# EAGLE board TempSetUP_V1 v6 (EAGLE 9.7.0)
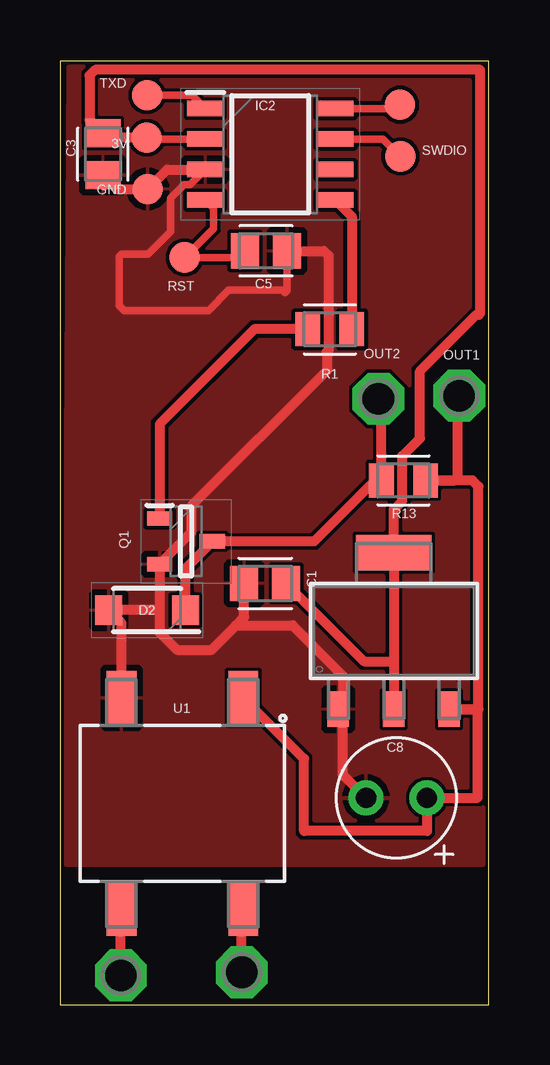
[diagram p0: board, top side]

Size 17.88 x 39.34 mm. Coordinates in mm from the lower left corner, seen from the top.
Outline: 0,0 17.88,0 17.88,39.34 0,39.34 0,0
Copper layers (1*16): Top / Bottom
Stack-up Default Layer Stack: Top User Defined 0.035mm / Dielectric-1 User Defined 1.5mm / Bottom User Defined 0.035mm
Design rules: minimum copper width 6mil, minimum drill size 0.35mm, copper clearance wire_polygon to wire_polygon 6mil, copper clearance wire_polygon to pad_smd 6mil, copper clearance wire_polygon to via 6mil, copper clearance pad_smd to pad_smd 6mil, copper clearance pad_smd to via 6mil, copper clearance via to via 6mil, copper clearance smd to pad (same net) 6mil, copper clearance smd to via (same net) 6mil, copper clearance smd to smd (same net) 6mil, dimension clearance 6mil, via restrict clearance 0mil, restrict clearance 0mil, drill distance 6mil, keepout clearance 0mil

## Footprints (pad centres in the part's own frame; a part is rotated, then mirrored left to right if it is on the bottom)
B1,27 = smd 1.27 x 1.27: TP 0,0
P1-13 = drill 1.321 pad 2.159 octagon: TP 0,0
CAPC2012X110 = smd 1.165 x 1.465: 1 -0.875,0; 2 0.875,0
CAPPRD254W65D500H1150B = drill 0.85 pad 1.45: 1 -1.27,0; 2 1.27,0
SODFL3718X130N = smd 1.12 x 1.22: 1 -1.6,0; 2 1.6,0
SOIC127P600X175-8N = smd 1.525 x 0.65: 1 -2.712,1.905; 2 -2.712,0.635; 3 -2.712,-0.635; 4 -2.712,-1.905; 5 2.712,-1.905; 6 2.712,-0.635; 7 2.712,0.635; 8 2.712,1.905
SOT95P230X110-3N = smd 1.05 x 0.6: 1 -1.1,0.95; 2 -1.1,-0.95; 3 1.1,0
RESC2012X65 = smd 1.031 x 1.42: 1 -0.919,0; 2 0.919,0
SOT508P985X260-4N = smd 2.235 x 1.245: 1 -4.394,2.54; 2 -4.394,-2.54; 3 4.394,-2.54; 4 4.394,2.54
SOT223-3_MXL = smd 0.889 x 1.473: 1 -2.311,-3.264; 2 0,-3.264; 3 2.311,-3.264 | smd 3.15 x 1.473: 4 0,3.264

## Placement (x,y rotation side)
3V  TPB1,27  [B1,27]  3.62,36.15 0 top
12VAC-PHASE1  TPPAD1-13  [P1-13]  7.58,1.36 0 top
12VAC-PHASE2  VDC  [P1-13]  2.54,1.23 0 top
C1  1uF  [CAPC2012X110]  8.56,17.57 180 top
C3  100nF  [CAPC2012X110]  1.8,35.47 270 top
C5  1uF  [CAPC2012X110]  8.59,31.43 0 top
C8  330 u x 35v  [CAPPRD254W65D500H1150B]  14.03,8.63 180 top
D2  SL1J  [SODFL3718X130N]  3.63,16.46 180 top
GND  G1  [B1,27]  3.66,34.02 0 top
IC2  STM32C011J6M6  [SOIC127P600X175-8N]  8.77,35.46 0 top
OUT1  TPPAD1-13  [P1-13]  16.65,25.4 0 top
OUT2  TPPAD1-13  [P1-13]  13.28,25.27 0 top
Q1  2N7002AK-QR  [SOT95P230X110-3N]  5.26,19.33 0 top
R1  100K  [RESC2012X65]  11.25,28.17 180 top
R13  2K x 1/2W  [RESC2012X65]  14.33,21.87 180 top
RST  TPB1,27  [B1,27]  5.21,31.16 0 top
SWCLK-TX  TPB1,27  [B1,27]  14.19,37.52 0 top
SWDIO  TPB1,27  [B1,27]  14.2,35.37 0 top
TXD  TPB1,27  [B1,27]  3.63,37.92 0 top
U1  DF08S  [SOT508P985X260-4N]  5.11,8.41 270 top
U2  SPX1117M3-L-3-3/TRSOT223-3_MXL  [SOT223-3_MXL]  13.92,15.59 0 top

## Library data of the parts
3V 12VAC-PHASE1 12VAC-PHASE2 GND OUT1 OUT2 RST SWCLK-TX SWDIO TXD = testpad
C1 C3 C5 = Capacitor; CATEGORY: Capacitor
C8 = Tinkercad; MODEL: RPF0610102M006K
D2 = SL1J; DESCRIPTION: Rectifier Diode Switching 600V 1A 1000ns 2-Pin SOD-123FL T/R; HEIGHT: 1.3mm; MANUFACTURER_NAME: Diotec; MANUFACTURER_PART_NUMBER: SL1J; MOUSER_PART_NUMBER: 637-SL1J; MOUSER_PRICE-STOCK: https://www.mouser.co.uk/ProductDetail/Diotec-Semiconductor/SL1J?qs=OlC7AqGiEDm%2FUyNJqMVviA%3D%3D
IC2 = STM32C011J6M6; DESCRIPTION: Mainstream Arm Cortex-M0+ MCU with 32 Kbytes of Flash memory, 6 Kbytes RAM, 48 MHz CPU, 2x USART, timers, ADC, comm. I/F, 2-3.6V; HEIGHT: 1.75mm; MANUFACTURER_NAME: STMicroelectronics; MANUFACTURER_PART_NUMBER: STM32C011J6M6; MOUSER_PART_NUMBER: 511-STM32C011J6M6; MOUSER_PRICE-STOCK: https://www.mouser.co.uk/ProductDetail/STMicroelectronics/STM32C011J6M6?qs=IPgv5n7u5Qas2LaNYHG%2FbQ%3D%3D
Q1 = 2N7002AK-QR; DESCRIPTION: N-Channel 60 V 240mA 320mW Surface Mount SOT-23-3 (TO-236); HEIGHT: 1.1mm; MANUFACTURER_NAME: Nexperia; MANUFACTURER_PART_NUMBER: 2N7002AK-QR; MOUSER_PART_NUMBER: 771-2N7002AK-QR; MOUSER_PRICE-STOCK: https://www.mouser.co.uk/ProductDetail/Nexperia/2N7002AK-QR?qs=mELouGlnn3ff0hT2G%252Bqyfw%3D%3D
R1 = Tutorial - Fusion 360; CATEGORY: Resistor; SUB-CATEGORY: Fixed
R13 = Resistor; CATEGORY: Resistor; SUB-CATEGORY: Fixed
U1 = DF08S; DESCRIPTION: DF08S, Bridge Rectifier Single Phase, 1.5A 800V, 4-Pin SDIP; HEIGHT: mm; MANUFACTURER_NAME: onsemi; MANUFACTURER_PART_NUMBER: DF08S; MOUSER_PART_NUMBER: 512-DF08S; MOUSER_PRICE-STOCK: https://www.mouser.co.uk/ProductDetail/onsemi-Fairchild/DF08S?qs=Ec0VQc59F%252BlRA0XgpNiCJg%3D%3D
U2 = 2023-10-17_10-46-12_Library; COPYRIGHT: Copyright (C) 2023 Ultra Librarian. All rights reserved.; MANUFACTURER_PART_NUMBER: SPX1117M3-L-3-3/TR; MFR_NAME: MaxLinear / Exar

## Nets
1KHZ: IC2.5 R1.1
CLK: IC2.8 SWCLK-TX.TP
DRAIN: D2.1 OUT2.TP Q1.3 R13.2
G: Q1.1 R1.2
GND: C1.2 C3.2 C5.2 C8.2 D2.2 GND.TP IC2.3 Q1.2 U1.2 U2.1
N$3: C8.1 OUT1.TP R13.1 U1.1 U2.3
RST: C5.1 IC2.4 RST.TP
TX: IC2.1 TXD.TP
VDC1: 12VAC-PHASE1.TP U1.4
VDC2: 12VAC-PHASE2.TP U1.3
VDD: 3V.TP C1.1 C3.1 IC2.2 U2.2 U2.4
ZERO_CROSSING: IC2.7 SWDIO.TP

## Tracks (layer width: path | path; a pad name or v marks a point on that pad's centre or on a via)
1KHZ
  Top 0.305: 11.81,33.56 IC2.5
  Top 0.406: IC2.5 12.17,32.87 R1.1
CLK
  Top 0.305: IC2.8 14.03,37.37 SWCLK-TX.TP
DRAIN
  Top 0.406: D2.1 5.23,18.2 Q1.3 10.6,19.33 13.14,21.87 R13.2 13.41,25.15 OUT2.TP
G
  Top 0.406: R1.2 8.11,28.17 4.16,24.21 Q1.1
GND
  Top 0.305: 9.58,31.54 C5.2 9.47,29.77 9.39,29.69 9.29,29.79 7.04,29.79 6.2,28.95 4.6,28.95 2.67,28.95 2.46,29.16 2.46,31.19 2.56,31.29 3.68,31.29 4.62,32.23 4.62,33.64 5.17,34.19 5.42,34.19 IC2.3
  Top 0.406: U2.1 11.8,12.14 11.8,12.47 | C5.2 11.01,31.43 11.2,31.24 11.2,27.31 11.12,27.23 11.12,26.44 5.48,20.79 5.48,19.77 5.48,19.7 Q1.2 4.16,16.41 | 4.16,16.41 4.16,15.52 4.88,14.81 6.33,14.81 7.34,15.82 | 7.34,15.82 9.7,15.82 10.52,15.01 11.8,13.73 11.8,12.47 | C3.2 2.37,34.02 GND.TP 4.47,34.83 IC2.3 | U1.2 2.56,15.92 D2.2 4.11,16.46 4.16,16.41 | C8.2 11.8,9.6 11.8,12.47 | 7.34,15.82 7.68,16.17 C1.2
  pour Top: 0.28,39.27 17.91,39.27 17.91,5.76 0.18,5.76 0.18,23.32
N$3
  Top 0.406: OUT1.TP 16.57,25.32 16.57,21.98 16.46,21.87 R13.1 17.2,21.87 17.45,21.62 17.45,12.33 U2.3 17.42,12.33 17.42,8.63 C8.1 15.3,7.25 10.19,7.25 10.19,10.26 U1.1
RST
  Top 0.305: IC2.4 6.4,33.22 6.4,32.36 RST.TP 7.45,31.16 C5.1
TX
  Top 0.305: IC2.1 5.51,37.92 TXD.TP
VDC1
  Top 0.406: 12VAC-PHASE1.TP 7.58,3.95 U1.4
VDC2
  Top 0.406: 12VAC-PHASE2.TP 2.54,3.99 U1.3
VDD
  Top 0.305: IC2.2 3.67,36.1 3V.TP
  Top 0.406: 13.92,14.32 U2.4 13.92,20.65 14.28,21.01 14.28,22.89 15.01,23.62 15.01,26.42 17.37,28.78 17.48,28.78 17.53,28.83 17.53,38.99 1.47,38.99 1.24,38.75 1.24,36.9 C3.1 1.99,36.15 3V.TP | 13.92,14.32 U2.2 | C1.1 12.69,14.32 13.92,14.32
ZERO_CROSSING
  Top 0.305: SWDIO.TP 13.48,36.1 IC2.7